# Altium PCB muhendislik_tasarim.PcbDoc
Units mil, origin at the board's own origin, x right, y up, seen from the top; angles counter-clockwise.
Board outline 6000 x 4000 mil, 2 copper layers (Top Layer, Bottom Layer); 8 components, 4 nets, 113 pads, 0 vias.
Unrouted connection lines stored in the file: 12.
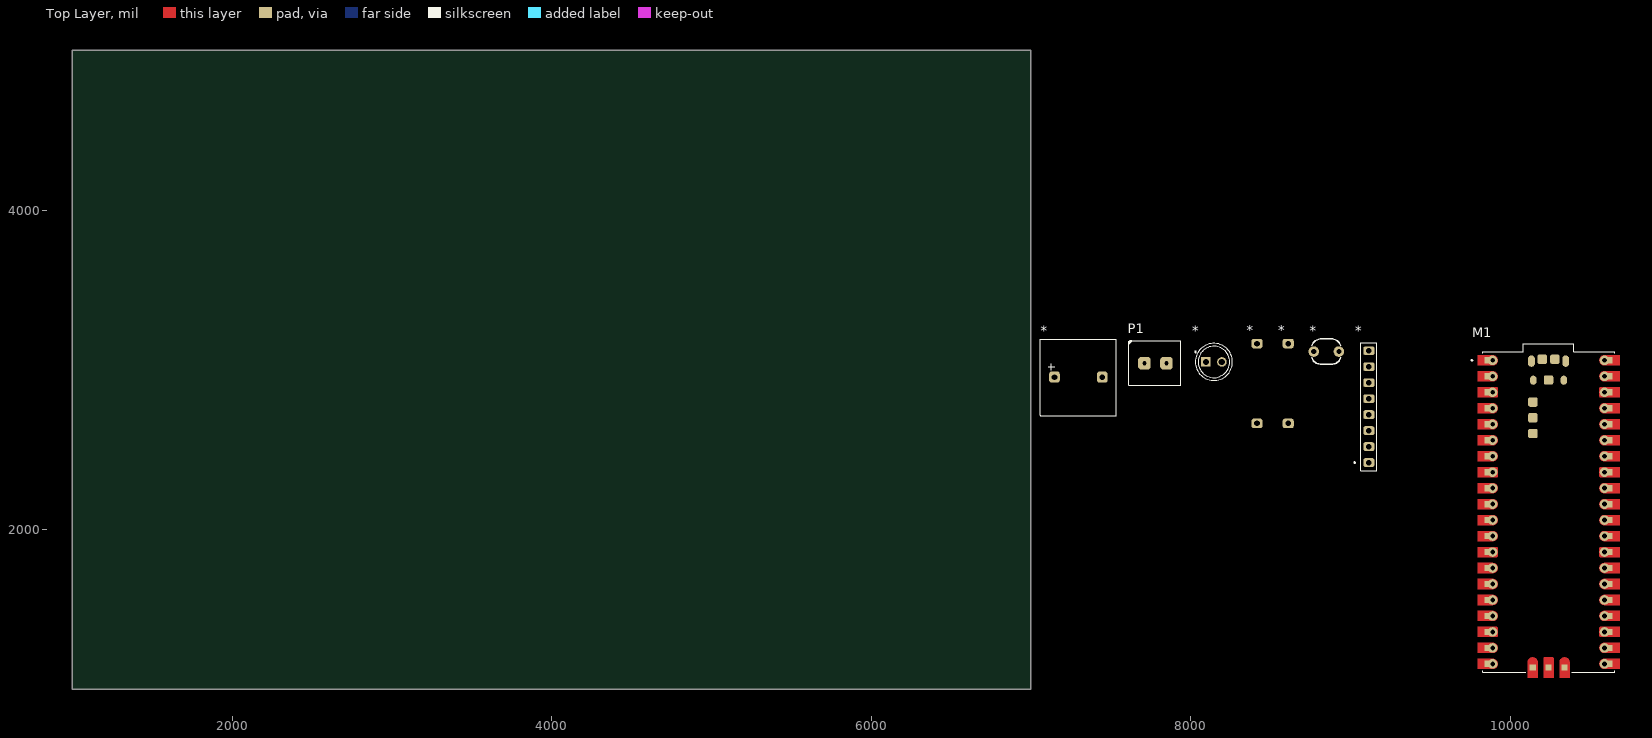
[diagram p0: Top Layer view]
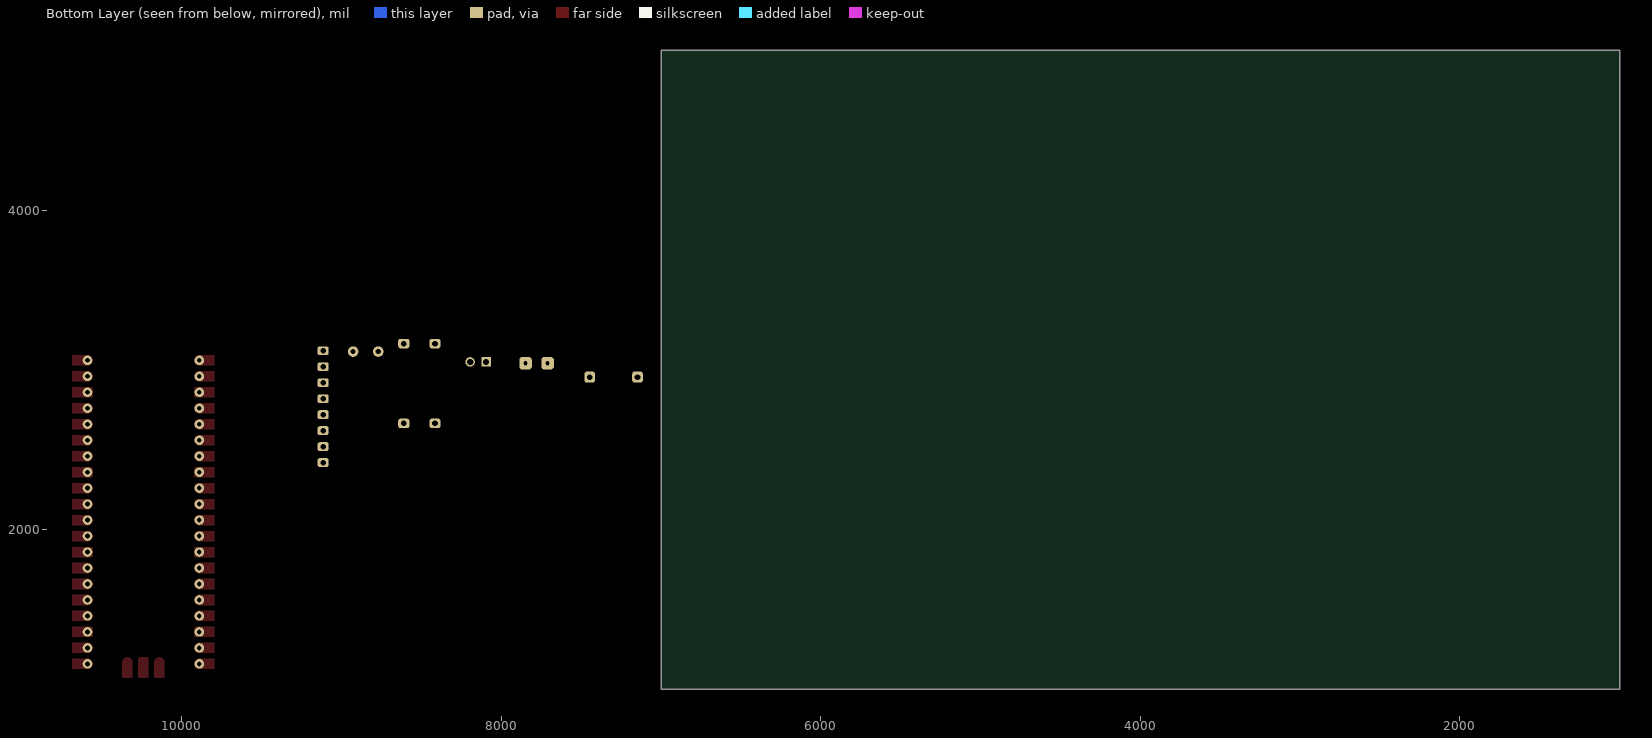
[diagram p1: Bottom Layer view, seen from below]

## Layer stack, top to bottom
Top Solder: solder mask 0.4, Solder Resist, Dk 3.5
Top Layer: signal copper 1.4
Dielectric 1: dielectric 12.6, FR-4, Dk 4.8
Bottom Layer: signal copper 1.4
Bottom Solder: solder mask 0.4, Solder Resist, Dk 3.5

## Board outline
1000,1000 7000,1000 7000,5000 1000,5000

## Design rules (kind name [scope] priority, off if disabled: settings)
Clearance [All] p1: gap=10 ignorepadtopadclearanceinfootprint=FALSE except(0: Arc-Hole Track-Hole SMDPad-Hole THPad-Hole Via-Hole Fill-Hole Poly-Hole Region-Hole Text-Hole)
PolygonConnect [All] p1: connectstyle=Relief reliefconductorwidth=10 reliefentries=4 polygonreliefangle="90 Angle" airgapwidth=10
RoomDefinition muhendislik_tasarim [InComponentClass('muhendislik_tasarim')] p1: confinementstyle=ConfineIn formatcopy=TRUE lockcomponents=FALSE outline 7045,1055 10705,1055 10705,3285 7045,3285
RoutingVias [All] p1: holewidth=28 width=50 viastyle="Through Hole" minholewidth=28 minwidth=50 maxholewidth=28 maxwidth=50
SolderMaskExpansion [All] p1: expansion=4 istentingtop=FALSE
Width [All] p1: maxlimit=10 minlimit=10 preferedwidth=10
30 further rules are at their usual default settings.

## Classes and differential pairs
component class muhendislik_tasarim: M1 P1

## Components (designator, comment, footprint, x,y, rotation, side; value= is the part's Value field where it differs from the comment)
* "resistor" resistor 8485,2650 r90 top
* "ldr" ldr 8755,3035 r0 top
* "resistor" resistor 8680,2650 r90 top
* "led" led 8040,2965 r0 top
* "mpu6050" mpu6050 9055,2360 r90 top
* "buzzer" buzzer 7045,2715 r0 top
M1 "raspberry_pico" raspberry_pico 9810,1060 r0 top
P1 "power" power 7615,3180 r0 top

## Footprints (in the part's own frame and the unit in brackets; to place one, negate y for a bottom-side part, rotate by r counter-clockwise, add the part's x,y. Pads: shape width x height; smd on the part's side, far side on the other; paste and mask are expansions set on the pad)
buzzer [mil]
  rrect50% 66.93x70 hole 35 mask+1.97: 1(102.24,239.88) 2(401.46,239.88)
  silkscreen extent 13,-1 490,477, body extent 16,2 488,474, height 374
ldr [mil]
  round 66 hole 31.5: 1(15,80) 2(172.48,80)
  silkscreen extent 3,1 184,159, body extent -3,-4 193,154, height 83
led [mil]
  round 59.37 hole 39.37: A(155,85)
  rect 59.37x59.37 hole 39.37: C(55,85)
  silkscreen extent -14,-31 221,201, body extent 3,-2 217,230, height 316
mpu6050 [mil]
  rrect50% 55.43x70 hole 35: 1(60,-60) 2(160,-60) 3(260,-60) 4(360,-60) 5(460,-60) 6(560,-60) 7(660,-60) 8(760,-60)
  silkscreen extent 10,-110 810,33, body extent -8,-650 838,0, height 334
power [mm]
  rrect50% 2x2 hole 0.65: 1(2.419,-3.514) 2(5.919,-3.514)
  silkscreen extent -0.09,-7.04 8.22,0.11, body extent 0.57,-10.92 8.07,-3.28, height 2.95
raspberry_pico [mil]
  rect 39.37x39.37 smd paste-39.37 mask+0: 1(48.5,2000) 2(48.5,1900) 3(48.5,1800) 4(48.5,1700) 5(48.5,1600) 6(48.5,1500) 7(48.5,1400) 8(48.5,1300) 9(48.5,1200) 10(48.5,1100) 11(48.5,1000) 12(48.5,900) 13(48.5,800) 14(48.5,700) 15(48.5,600) 16(48.5,500) 17(48.5,400) 18(48.5,300) 19(48.5,200) 20(48.5,100) 21(811.5,100) 22(811.5,200) 23(811.5,300) 24(811.5,400) 25(811.5,500) 26(811.5,600) 27(811.5,700) 28(811.5,800) 29(811.5,900) 30(811.5,1000) 31(811.5,1100) 32(811.5,1200) 33(811.5,1300) 34(811.5,1400) 35(811.5,1500) 36(811.5,1600) 37(811.5,1700) 38(811.5,1800) 39(811.5,1900) 40(811.5,2000) D1(330,77.56) D2(430,77.56) D3(530,77.56)
  round 60 hole 30: 1(80,2000) 2(80,1900) 3(80,1800) 4(80,1700) 5(80,1600) 6(80,1500) 7(80,1400) 8(80,1300) 9(80,1200) 10(80,1100) 11(80,1000) 12(80,900) 13(80,800) 14(80,700) 15(80,600) 16(80,500) 17(80,400) 18(80,300) 19(80,200) 20(80,100) 21(780,100) 22(780,200) 23(780,300) 24(780,400) 25(780,500) 26(780,600) 27(780,700) 28(780,800) 29(780,900) 30(780,1000) 31(780,1100) 32(780,1200) 33(780,1300) 34(780,1400) 35(780,1500) 36(780,1600) 37(780,1700) 38(780,1800) 39(780,1900) 40(780,2000)
  oval 43.31x70.87 smd: A(322.72,1994.88) B(537.28,1994.88)
  oval 41.34x57.09 smd: C(334.53,1875.59) D(525.47,1875.59)
  rrect40% 59.06x59.06 smd: TP1(430,1876.77) TP2(469.37,2006.69) TP3(390.63,2006.69) TP4(331.57,1738.98) TP5(331.57,1640.55) TP6(331.57,1542.13)
  Top Layer region: 81.65,1231.46 83.31,1231.34 84.92,1231.1 86.54,1230.83 88.15,1230.43 89.72,1229.96 91.3,1229.41 92.8,1228.78 94.29,1228.07 95.75,1227.28 97.17,1226.42 98.5,1225.47 99.8,1224.49 101.06,1223.43 102.28,1222.28 103.43,1221.06 104.49,1219.8 105.47,1218.5 106.42,1217.17 107.28,1215.75 108.07,1214.29 108.78,1212.8 109.41,1211.3 109.96,1209.72 110.43,1208.15 110.83,1206.54 111.1,1204.92 111.34,1203.31 111.46,1201.65 111.5,1200 111.46,1198.35 111.34,1196.69 111.1,1195.08 110.83,1193.46 110.43,1191.85 109.96,1190.28 109.41,1188.7 108.78,1187.2 108.07,1185.71 107.28,1184.25 106.42,1182.83 105.47,1181.5 104.49,1180.2 103.43,1178.94 102.28,1177.72 101.06,1176.57 99.8,1175.51 98.5,1174.53 97.17,1173.58 95.75,1172.72 94.29,1171.93 92.8,1171.22 91.3,1170.59 89.72,1170.04 88.15,1169.57 86.54,1169.17 84.92,1168.9 83.31,1168.66 81.65,1168.54 80,1168.5 -14.49,1168.5 -14.49,1231.5 80,1231.5
  Top Layer region: 81.65,1131.46 83.31,1131.34 84.92,1131.1 86.54,1130.83 88.15,1130.43 89.72,1129.96 91.3,1129.41 92.8,1128.78 94.29,1128.07 95.75,1127.28 97.17,1126.42 98.5,1125.47 99.8,1124.49 101.06,1123.43 102.28,1122.28 103.43,1121.06 104.49,1119.8 105.47,1118.5 106.42,1117.17 107.28,1115.75 108.07,1114.29 108.78,1112.8 109.41,1111.3 109.96,1109.72 110.43,1108.15 110.83,1106.54 111.1,1104.92 111.34,1103.31 111.46,1101.65 111.5,1100 111.46,1098.35 111.34,1096.69 111.1,1095.08 110.83,1093.46 110.43,1091.85 109.96,1090.28 109.41,1088.7 108.78,1087.2 108.07,1085.71 107.28,1084.25 106.42,1082.83 105.47,1081.5 104.49,1080.2 103.43,1078.94 102.28,1077.72 101.06,1076.57 99.8,1075.51 98.5,1074.53 97.17,1073.58 95.75,1072.72 94.29,1071.93 92.8,1071.22 91.3,1070.59 89.72,1070.04 88.15,1069.57 86.54,1069.17 84.92,1068.9 83.31,1068.66 81.65,1068.54 80,1068.5 -14.49,1068.5 -14.49,1131.5 80,1131.5
  Top Layer region: 81.65,1031.46 83.31,1031.34 84.92,1031.1 86.54,1030.83 88.15,1030.43 89.72,1029.96 91.3,1029.41 92.8,1028.78 94.29,1028.07 95.75,1027.28 97.17,1026.42 98.5,1025.47 99.8,1024.49 101.06,1023.43 102.28,1022.28 103.43,1021.06 104.49,1019.8 105.47,1018.5 106.42,1017.17 107.28,1015.75 108.07,1014.29 108.78,1012.8 109.41,1011.3 109.96,1009.72 110.43,1008.15 110.83,1006.54 111.1,1004.92 111.34,1003.31 111.46,1001.65 111.5,1000 111.46,998.35 111.34,996.69 111.1,995.08 110.83,993.46 110.43,991.85 109.96,990.28 109.41,988.7 108.78,987.2 108.07,985.71 107.28,984.25 106.42,982.83 105.47,981.5 104.49,980.2 103.43,978.94 102.28,977.72 101.06,976.57 99.8,975.51 98.5,974.53 97.17,973.58 95.75,972.72 94.29,971.93 92.8,971.22 91.3,970.59 89.72,970.04 88.15,969.57 86.54,969.17 84.92,968.9 83.31,968.66 81.65,968.54 80,968.5 -14.49,968.5 -14.49,1031.5 80,1031.5
  Top Layer region: 81.65,931.46 83.31,931.34 84.92,931.1 86.54,930.83 88.15,930.43 89.72,929.96 91.3,929.41 92.8,928.78 94.29,928.07 95.75,927.28 97.17,926.42 98.5,925.47 99.8,924.49 101.06,923.43 102.28,922.28 103.43,921.06 104.49,919.8 105.47,918.5 106.42,917.17 107.28,915.75 108.07,914.29 108.78,912.8 109.41,911.3 109.96,909.72 110.43,908.15 110.83,906.54 111.1,904.92 111.34,903.31 111.46,901.65 111.5,900 111.46,898.35 111.34,896.69 111.1,895.08 110.83,893.46 110.43,891.85 109.96,890.28 109.41,888.7 108.78,887.2 108.07,885.71 107.28,884.25 106.42,882.83 105.47,881.5 104.49,880.2 103.43,878.94 102.28,877.72 101.06,876.57 99.8,875.51 98.5,874.53 97.17,873.58 95.75,872.72 94.29,871.93 92.8,871.22 91.3,870.59 89.72,870.04 88.15,869.57 86.54,869.17 84.92,868.9 83.31,868.66 81.65,868.54 80,868.5 -14.49,868.5 -14.49,931.5 80,931.5
  Top Layer region: 81.65,731.46 83.31,731.34 84.92,731.1 86.54,730.83 88.15,730.43 89.72,729.96 91.3,729.41 92.8,728.78 94.29,728.07 95.75,727.28 97.17,726.42 98.5,725.47 99.8,724.49 101.06,723.43 102.28,722.28 103.43,721.06 104.49,719.8 105.47,718.5 106.42,717.17 107.28,715.75 108.07,714.29 108.78,712.8 109.41,711.3 109.96,709.72 110.43,708.15 110.83,706.54 111.1,704.92 111.34,703.31 111.46,701.65 111.5,700 111.46,698.35 111.34,696.69 111.1,695.08 110.83,693.46 110.43,691.85 109.96,690.28 109.41,688.7 108.78,687.2 108.07,685.71 107.28,684.25 106.42,682.83 105.47,681.5 104.49,680.2 103.43,678.94 102.28,677.72 101.06,676.57 99.8,675.51 98.5,674.53 97.17,673.58 95.75,672.72 94.29,671.93 92.8,671.22 91.3,670.59 89.72,670.04 88.15,669.57 86.54,669.17 84.92,668.9 83.31,668.66 81.65,668.54 80,668.5 -14.49,668.5 -14.49,731.5 80,731.5
  Top Layer region: 81.65,631.46 83.31,631.34 84.92,631.1 86.54,630.83 88.15,630.43 89.72,629.96 91.3,629.41 92.8,628.78 94.29,628.07 95.75,627.28 97.17,626.42 98.5,625.47 99.8,624.49 101.06,623.43 102.28,622.28 103.43,621.06 104.49,619.8 105.47,618.5 106.42,617.17 107.28,615.75 108.07,614.29 108.78,612.8 109.41,611.3 109.96,609.72 110.43,608.15 110.83,606.54 111.1,604.92 111.34,603.31 111.46,601.65 111.5,600 111.46,598.35 111.34,596.69 111.1,595.08 110.83,593.46 110.43,591.85 109.96,590.28 109.41,588.7 108.78,587.2 108.07,585.71 107.28,584.25 106.42,582.83 105.47,581.5 104.49,580.2 103.43,578.94 102.28,577.72 101.06,576.57 99.8,575.51 98.5,574.53 97.17,573.58 95.75,572.72 94.29,571.93 92.8,571.22 91.3,570.59 89.72,570.04 88.15,569.57 86.54,569.17 84.92,568.9 83.31,568.66 81.65,568.54 80,568.5 -14.49,568.5 -14.49,631.5 80,631.5
  Top Layer region: 81.65,531.46 83.31,531.34 84.92,531.1 86.54,530.83 88.15,530.43 89.72,529.96 91.3,529.41 92.8,528.78 94.29,528.07 95.75,527.28 97.17,526.42 98.5,525.47 99.8,524.49 101.06,523.43 102.28,522.28 103.43,521.06 104.49,519.8 105.47,518.5 106.42,517.17 107.28,515.75 108.07,514.29 108.78,512.8 109.41,511.3 109.96,509.72 110.43,508.15 110.83,506.54 111.1,504.92 111.34,503.31 111.46,501.65 111.5,500 111.46,498.35 111.34,496.69 111.1,495.08 110.83,493.46 110.43,491.85 109.96,490.28 109.41,488.7 108.78,487.2 108.07,485.71 107.28,484.25 106.42,482.83 105.47,481.5 104.49,480.2 103.43,478.94 102.28,477.72 101.06,476.57 99.8,475.51 98.5,474.53 97.17,473.58 95.75,472.72 94.29,471.93 92.8,471.22 91.3,470.59 89.72,470.04 88.15,469.57 86.54,469.17 84.92,468.9 83.31,468.66 81.65,468.54 80,468.5 -14.49,468.5 -14.49,531.5 80,531.5
  Top Layer region: 81.65,431.46 83.31,431.34 84.92,431.1 86.54,430.83 88.15,430.43 89.72,429.96 91.3,429.41 92.8,428.78 94.29,428.07 95.75,427.28 97.17,426.42 98.5,425.47 99.8,424.49 101.06,423.43 102.28,422.28 103.43,421.06 104.49,419.8 105.47,418.5 106.42,417.17 107.28,415.75 108.07,414.29 108.78,412.8 109.41,411.3 109.96,409.72 110.43,408.15 110.83,406.54 111.1,404.92 111.34,403.31 111.46,401.65 111.5,400 111.46,398.35 111.34,396.69 111.1,395.08 110.83,393.46 110.43,391.85 109.96,390.28 109.41,388.7 108.78,387.2 108.07,385.71 107.28,384.25 106.42,382.83 105.47,381.5 104.49,380.2 103.43,378.94 102.28,377.72 101.06,376.57 99.8,375.51 98.5,374.53 97.17,373.58 95.75,372.72 94.29,371.93 92.8,371.22 91.3,370.59 89.72,370.04 88.15,369.57 86.54,369.17 84.92,368.9 83.31,368.66 81.65,368.54 80,368.5 -14.49,368.5 -14.49,431.5 80,431.5
  Top Layer region: 81.65,231.46 83.31,231.34 84.92,231.1 86.54,230.83 88.15,230.43 89.72,229.96 91.3,229.41 92.8,228.78 94.29,228.07 95.75,227.28 97.17,226.42 98.5,225.47 99.8,224.49 101.06,223.43 102.28,222.28 103.43,221.06 104.49,219.8 105.47,218.5 106.42,217.17 107.28,215.75 108.07,214.29 108.78,212.8 109.41,211.3 109.96,209.72 110.43,208.15 110.83,206.54 111.1,204.92 111.34,203.31 111.46,201.65 111.5,200 111.46,198.35 111.34,196.69 111.1,195.08 110.83,193.46 110.43,191.85 109.96,190.28 109.41,188.7 108.78,187.2 108.07,185.71 107.28,184.25 106.42,182.83 105.47,181.5 104.49,180.2 103.43,178.94 102.28,177.72 101.06,176.57 99.8,175.51 98.5,174.53 97.17,173.58 95.75,172.72 94.29,171.93 92.8,171.22 91.3,170.59 89.72,170.04 88.15,169.57 86.54,169.17 84.92,168.9 83.31,168.66 81.65,168.54 80,168.5 -14.49,168.5 -14.49,231.5 80,231.5
  Top Layer region: 81.65,131.46 83.31,131.34 84.92,131.1 86.54,130.83 88.15,130.43 89.72,129.96 91.3,129.41 92.8,128.78 94.29,128.07 95.75,127.28 97.17,126.42 98.5,125.47 99.8,124.49 101.06,123.43 102.28,122.28 103.43,121.06 104.49,119.8 105.47,118.5 106.42,117.17 107.28,115.75 108.07,114.29 108.78,112.8 109.41,111.3 109.96,109.72 110.43,108.15 110.83,106.54 111.1,104.92 111.34,103.31 111.46,101.65 111.5,100 111.46,98.35 111.34,96.69 111.1,95.08 110.83,93.46 110.43,91.85 109.96,90.28 109.41,88.7 108.78,87.2 108.07,85.71 107.28,84.25 106.42,82.83 105.47,81.5 104.49,80.2 103.43,78.94 102.28,77.72 101.06,76.57 99.8,75.51 98.5,74.53 97.17,73.58 95.75,72.72 94.29,71.93 92.8,71.22 91.3,70.59 89.72,70.04 88.15,69.57 86.54,69.17 84.92,68.9 83.31,68.66 81.65,68.54 80,68.5 -14.49,68.5 -14.49,131.5 80,131.5
  Top Layer region: 104.45,1831.46 104.84,1831.42 105.28,1831.34 105.67,1831.22 106.06,1831.1 106.46,1830.98 106.81,1830.83 107.2,1830.63 107.56,1830.43 107.91,1830.24 108.27,1830 108.58,1829.72 108.9,1829.49 109.17,1829.17 109.49,1828.9 109.72,1828.58 110,1828.27 110.24,1827.91 110.43,1827.56 110.63,1827.2 110.83,1826.81 110.98,1826.46 111.1,1826.06 111.22,1825.67 111.34,1825.28 111.42,1824.84 111.46,1824.45 111.5,1824.02 111.5,1823.62 111.5,1776.38 111.5,1775.98 111.46,1775.55 111.42,1775.16 111.34,1774.72 111.22,1774.33 111.1,1773.94 110.98,1773.54 110.83,1773.19 110.63,1772.8 110.43,1772.44 110.24,1772.09 110,1771.73 109.72,1771.42 109.49,1771.1 109.17,1770.83 108.9,1770.51 108.58,1770.28 108.27,1770 107.91,1769.76 107.56,1769.57 107.2,1769.37 106.81,1769.17 106.46,1769.02 106.06,1768.9 105.67,1768.78 105.28,1768.66 104.84,1768.58 104.45,1768.54 104.02,1768.5 -14.49,1768.5 -14.49,1831.5 104.02,1831.5
  Top Layer region: 104.45,1331.46 104.84,1331.42 105.28,1331.34 105.67,1331.22 106.06,1331.1 106.46,1330.98 106.81,1330.83 107.2,1330.63 107.56,1330.43 107.91,1330.24 108.27,1330 108.58,1329.72 108.9,1329.49 109.17,1329.17 109.49,1328.9 109.72,1328.58 110,1328.27 110.24,1327.91 110.43,1327.56 110.63,1327.2 110.83,1326.81 110.98,1326.46 111.1,1326.06 111.22,1325.67 111.34,1325.28 111.42,1324.84 111.46,1324.45 111.5,1324.02 111.5,1323.62 111.5,1276.38 111.5,1275.98 111.46,1275.55 111.42,1275.16 111.34,1274.72 111.22,1274.33 111.1,1273.94 110.98,1273.54 110.83,1273.19 110.63,1272.8 110.43,1272.44 110.24,1272.09 110,1271.73 109.72,1271.42 109.49,1271.1 109.17,1270.83 108.9,1270.51 108.58,1270.28 108.27,1270 107.91,1269.76 107.56,1269.57 107.2,1269.37 106.81,1269.17 106.46,1269.02 106.06,1268.9 105.67,1268.78 105.28,1268.66 104.84,1268.58 104.45,1268.54 104.02,1268.5 -14.49,1268.5 -14.49,1331.5 104.02,1331.5
  Top Layer region: 104.45,831.46 104.84,831.42 105.28,831.34 105.67,831.22 106.06,831.1 106.46,830.98 106.81,830.83 107.2,830.63 107.56,830.43 107.91,830.24 108.27,830 108.58,829.72 108.9,829.49 109.17,829.17 109.49,828.9 109.72,828.58 110,828.27 110.24,827.91 110.43,827.56 110.63,827.2 110.83,826.81 110.98,826.46 111.1,826.06 111.22,825.67 111.34,825.28 111.42,824.84 111.46,824.45 111.5,824.02 111.5,823.62 111.5,776.38 111.5,775.98 111.46,775.55 111.42,775.16 111.34,774.72 111.22,774.33 111.1,773.94 110.98,773.54 110.83,773.19 110.63,772.8 110.43,772.44 110.24,772.09 110,771.73 109.72,771.42 109.49,771.1 109.17,770.83 108.9,770.51 108.58,770.28 108.27,770 107.91,769.76 107.56,769.57 107.2,769.37 106.81,769.17 106.46,769.02 106.06,768.9 105.67,768.78 105.28,768.66 104.84,768.58 104.45,768.54 104.02,768.5 -14.49,768.5 -14.49,831.5 104.02,831.5
  Top Layer region: 104.45,331.46 104.84,331.42 105.28,331.34 105.67,331.22 106.06,331.1 106.46,330.98 106.81,330.83 107.2,330.63 107.56,330.43 107.91,330.24 108.27,330 108.58,329.72 108.9,329.49 109.17,329.17 109.49,328.9 109.72,328.58 110,328.27 110.24,327.91 110.43,327.56 110.63,327.2 110.83,326.81 110.98,326.46 111.1,326.06 111.22,325.67 111.34,325.28 111.42,324.84 111.46,324.45 111.5,324.02 111.5,323.62 111.5,276.38 111.5,275.98 111.46,275.55 111.42,275.16 111.34,274.72 111.22,274.33 111.1,273.94 110.98,273.54 110.83,273.19 110.63,272.8 110.43,272.44 110.24,272.09 110,271.73 109.72,271.42 109.49,271.1 109.17,270.83 108.9,270.51 108.58,270.28 108.27,270 107.91,269.76 107.56,269.57 107.2,269.37 106.81,269.17 106.46,269.02 106.06,268.9 105.67,268.78 105.28,268.66 104.84,268.58 104.45,268.54 104.02,268.5 -14.49,268.5 -14.49,331.5 104.02,331.5
  Top Layer region: 81.65,1931.46 83.31,1931.34 84.92,1931.1 86.54,1930.83 88.15,1930.43 89.72,1929.96 91.3,1929.41 92.8,1928.78 94.29,1928.07 95.75,1927.28 97.17,1926.42 98.5,1925.47 99.8,1924.49 101.06,1923.43 102.28,1922.28 103.43,1921.06 104.49,1919.8 105.47,1918.5 106.42,1917.17 107.28,1915.75 108.07,1914.29 108.78,1912.8 109.41,1911.3 109.96,1909.72 110.43,1908.15 110.83,1906.54 111.1,1904.92 111.34,1903.31 111.46,1901.65 111.5,1900 111.46,1898.35 111.34,1896.69 111.1,1895.08 110.83,1893.46 110.43,1891.85 109.96,1890.28 109.41,1888.7 108.78,1887.2 108.07,1885.71 107.28,1884.25 106.42,1882.83 105.47,1881.5 104.49,1880.2 103.43,1878.94 102.28,1877.72 101.06,1876.57 99.8,1875.51 98.5,1874.53 97.17,1873.58 95.75,1872.72 94.29,1871.93 92.8,1871.22 91.3,1870.59 89.72,1870.04 88.15,1869.57 86.54,1869.17 84.92,1868.9 83.31,1868.66 81.65,1868.54 80,1868.5 -14.49,1868.5 -14.49,1931.5 80,1931.5
  Top Layer region: 81.65,1731.46 83.31,1731.34 84.92,1731.1 86.54,1730.83 88.15,1730.43 89.72,1729.96 91.3,1729.41 92.8,1728.78 94.29,1728.07 95.75,1727.28 97.17,1726.42 98.5,1725.47 99.8,1724.49 101.06,1723.43 102.28,1722.28 103.43,1721.06 104.49,1719.8 105.47,1718.5 106.42,1717.17 107.28,1715.75 108.07,1714.29 108.78,1712.8 109.41,1711.3 109.96,1709.72 110.43,1708.15 110.83,1706.54 111.1,1704.92 111.34,1703.31 111.46,1701.65 111.5,1700 111.46,1698.35 111.34,1696.69 111.1,1695.08 110.83,1693.46 110.43,1691.85 109.96,1690.28 109.41,1688.7 108.78,1687.2 108.07,1685.71 107.28,1684.25 106.42,1682.83 105.47,1681.5 104.49,1680.2 103.43,1678.94 102.28,1677.72 101.06,1676.57 99.8,1675.51 98.5,1674.53 97.17,1673.58 95.75,1672.72 94.29,1671.93 92.8,1671.22 91.3,1670.59 89.72,1670.04 88.15,1669.57 86.54,1669.17 84.92,1668.9 83.31,1668.66 81.65,1668.54 80,1668.5 -14.49,1668.5 -14.49,1731.5 80,1731.5
  Top Layer region: 81.65,1631.46 83.31,1631.34 84.92,1631.1 86.54,1630.83 88.15,1630.43 89.72,1629.96 91.3,1629.41 92.8,1628.78 94.29,1628.07 95.75,1627.28 97.17,1626.42 98.5,1625.47 99.8,1624.49 101.06,1623.43 102.28,1622.28 103.43,1621.06 104.49,1619.8 105.47,1618.5 106.42,1617.17 107.28,1615.75 108.07,1614.29 108.78,1612.8 109.41,1611.3 109.96,1609.72 110.43,1608.15 110.83,1606.54 111.1,1604.92 111.34,1603.31 111.46,1601.65 111.5,1600 111.46,1598.35 111.34,1596.69 111.1,1595.08 110.83,1593.46 110.43,1591.85 109.96,1590.28 109.41,1588.7 108.78,1587.2 108.07,1585.71 107.28,1584.25 106.42,1582.83 105.47,1581.5 104.49,1580.2 103.43,1578.94 102.28,1577.72 101.06,1576.57 99.8,1575.51 98.5,1574.53 97.17,1573.58 95.75,1572.72 94.29,1571.93 92.8,1571.22 91.3,1570.59 89.72,1570.04 88.15,1569.57 86.54,1569.17 84.92,1568.9 83.31,1568.66 81.65,1568.54 80,1568.5 -14.49,1568.5 -14.49,1631.5 80,1631.5
  Top Layer region: 81.65,1531.46 83.31,1531.34 84.92,1531.1 86.54,1530.83 88.15,1530.43 89.72,1529.96 91.3,1529.41 92.8,1528.78 94.29,1528.07 95.75,1527.28 97.17,1526.42 98.5,1525.47 99.8,1524.49 101.06,1523.43 102.28,1522.28 103.43,1521.06 104.49,1519.8 105.47,1518.5 106.42,1517.17 107.28,1515.75 108.07,1514.29 108.78,1512.8 109.41,1511.3 109.96,1509.72 110.43,1508.15 110.83,1506.54 111.1,1504.92 111.34,1503.31 111.46,1501.65 111.5,1500 111.46,1498.35 111.34,1496.69 111.1,1495.08 110.83,1493.46 110.43,1491.85 109.96,1490.28 109.41,1488.7 108.78,1487.2 108.07,1485.71 107.28,1484.25 106.42,1482.83 105.47,1481.5 104.49,1480.2 103.43,1478.94 102.28,1477.72 101.06,1476.57 99.8,1475.51 98.5,1474.53 97.17,1473.58 95.75,1472.72 94.29,1471.93 92.8,1471.22 91.3,1470.59 89.72,1470.04 88.15,1469.57 86.54,1469.17 84.92,1468.9 83.31,1468.66 81.65,1468.54 80,1468.5 -14.49,1468.5 -14.49,1531.5 80,1531.5
  Top Layer region: 81.65,1431.46 83.31,1431.34 84.92,1431.1 86.54,1430.83 88.15,1430.43 89.72,1429.96 91.3,1429.41 92.8,1428.78 94.29,1428.07 95.75,1427.28 97.17,1426.42 98.5,1425.47 99.8,1424.49 101.06,1423.43 102.28,1422.28 103.43,1421.06 104.49,1419.8 105.47,1418.5 106.42,1417.17 107.28,1415.75 108.07,1414.29 108.78,1412.8 109.41,1411.3 109.96,1409.72 110.43,1408.15 110.83,1406.54 111.1,1404.92 111.34,1403.31 111.46,1401.65 111.5,1400 111.46,1398.35 111.34,1396.69 111.1,1395.08 110.83,1393.46 110.43,1391.85 109.96,1390.28 109.41,1388.7 108.78,1387.2 108.07,1385.71 107.28,1384.25 106.42,1382.83 105.47,1381.5 104.49,1380.2 103.43,1378.94 102.28,1377.72 101.06,1376.57 99.8,1375.51 98.5,1374.53 97.17,1373.58 95.75,1372.72 94.29,1371.93 92.8,1371.22 91.3,1370.59 89.72,1370.04 88.15,1369.57 86.54,1369.17 84.92,1368.9 83.31,1368.66 81.65,1368.54 80,1368.5 -14.49,1368.5 -14.49,1431.5 80,1431.5
  Top Layer region: 874.49,1768.5 755.98,1768.5 755.55,1768.54 755.16,1768.58 754.72,1768.66 754.33,1768.78 753.94,1768.9 753.54,1769.02 753.19,1769.17 752.8,1769.37 752.44,1769.57 752.09,1769.76 751.73,1770 751.42,1770.28 751.1,1770.51 750.83,1770.83 750.51,1771.1 750.28,1771.42 750,1771.73 749.76,1772.09 749.57,1772.44 749.37,1772.8 749.17,1773.19 749.02,1773.54 748.9,1773.94 748.78,1774.33 748.66,1774.72 748.58,1775.16 748.54,1775.55 748.5,1775.98 748.5,1776.38 748.5,1823.62 748.5,1824.02 748.54,1824.45 748.58,1824.84 748.66,1825.28 748.78,1825.67 748.9,1826.06 749.02,1826.46 749.17,1826.81 749.37,1827.2 749.57,1827.56 749.76,1827.91 750,1828.27 750.28,1828.58 750.51,1828.9 750.83,1829.17 751.1,1829.49 751.42,1829.72 751.73,1830 752.09,1830.24 752.44,1830.43 752.8,1830.63 753.19,1830.83 753.54,1830.98 753.94,1831.1 754.33,1831.22 754.72,1831.34 755.16,1831.42 755.55,1831.46 755.98,1831.5 874.49,1831.5
  Top Layer region: 874.49,1868.5 780,1868.5 778.35,1868.54 776.69,1868.66 775.08,1868.9 773.46,1869.17 771.85,1869.57 770.28,1870.04 768.7,1870.59 767.2,1871.22 765.71,1871.93 764.25,1872.72 762.83,1873.58 761.5,1874.53 760.2,1875.51 758.94,1876.57 757.72,1877.72 756.57,1878.94 755.51,1880.2 754.53,1881.5 753.58,1882.83 752.72,1884.25 751.93,1885.71 751.22,1887.2 750.59,1888.7 750.04,1890.28 749.57,1891.85 749.17,1893.46 748.9,1895.08 748.66,1896.69 748.54,1898.35 748.5,1900 748.54,1901.65 748.66,1903.31 748.9,1904.92 749.17,1906.54 749.57,1908.15 750.04,1909.72 750.59,1911.3 751.22,1912.8 751.93,1914.29 752.72,1915.75 753.58,1917.17 754.53,1918.5 755.51,1919.8 756.57,1921.06 757.72,1922.28 758.94,1923.43 760.2,1924.49 761.5,1925.47 762.83,1926.42 764.25,1927.28 765.71,1928.07 767.2,1928.78 768.7,1929.41 770.28,1929.96 771.85,1930.43 773.46,1930.83 775.08,1931.1 776.69,1931.34 778.35,1931.46 780,1931.5 874.49,1931.5
  Top Layer region: 874.49,1468.5 780,1468.5 778.35,1468.54 776.69,1468.66 775.08,1468.9 773.46,1469.17 771.85,1469.57 770.28,1470.04 768.7,1470.59 767.2,1471.22 765.71,1471.93 764.25,1472.72 762.83,1473.58 761.5,1474.53 760.2,1475.51 758.94,1476.57 757.72,1477.72 756.57,1478.94 755.51,1480.2 754.53,1481.5 753.58,1482.83 752.72,1484.25 751.93,1485.71 751.22,1487.2 750.59,1488.7 750.04,1490.28 749.57,1491.85 749.17,1493.46 748.9,1495.08 748.66,1496.69 748.54,1498.35 748.5,1500 748.54,1501.65 748.66,1503.31 748.9,1504.92 749.17,1506.54 749.57,1508.15 750.04,1509.72 750.59,1511.3 751.22,1512.8 751.93,1514.29 752.72,1515.75 753.58,1517.17 754.53,1518.5 755.51,1519.8 756.57,1521.06 757.72,1522.28 758.94,1523.43 760.2,1524.49 761.5,1525.47 762.83,1526.42 764.25,1527.28 765.71,1528.07 767.2,1528.78 768.7,1529.41 770.28,1529.96 771.85,1530.43 773.46,1530.83 775.08,1531.1 776.69,1531.34 778.35,1531.46 780,1531.5 874.49,1531.5
  Top Layer region: 874.49,968.5 780,968.5 778.35,968.54 776.69,968.66 775.08,968.9 773.46,969.17 771.85,969.57 770.28,970.04 768.7,970.59 767.2,971.22 765.71,971.93 764.25,972.72 762.83,973.58 761.5,974.53 760.2,975.51 758.94,976.57 757.72,977.72 756.57,978.94 755.51,980.2 754.53,981.5 753.58,982.83 752.72,984.25 751.93,985.71 751.22,987.2 750.59,988.7 750.04,990.28 749.57,991.85 749.17,993.46 748.9,995.08 748.66,996.69 748.54,998.35 748.5,1000 748.54,1001.65 748.66,1003.31 748.9,1004.92 749.17,1006.54 749.57,1008.15 750.04,1009.72 750.59,1011.3 751.22,1012.8 751.93,1014.29 752.72,1015.75 753.58,1017.17 754.53,1018.5 755.51,1019.8 756.57,1021.06 757.72,1022.28 758.94,1023.43 760.2,1024.49 761.5,1025.47 762.83,1026.42 764.25,1027.28 765.71,1028.07 767.2,1028.78 768.7,1029.41 770.28,1029.96 771.85,1030.43 773.46,1030.83 775.08,1031.1 776.69,1031.34 778.35,1031.46 780,1031.5 874.49,1031.5
  Top Layer region: 874.49,868.5 780,868.5 778.35,868.54 776.69,868.66 775.08,868.9 773.46,869.17 771.85,869.57 770.28,870.04 768.7,870.59 767.2,871.22 765.71,871.93 764.25,872.72 762.83,873.58 761.5,874.53 760.2,875.51 758.94,876.57 757.72,877.72 756.57,878.94 755.51,880.2 754.53,881.5 753.58,882.83 752.72,884.25 751.93,885.71 751.22,887.2 750.59,888.7 750.04,890.28 749.57,891.85 749.17,893.46 748.9,895.08 748.66,896.69 748.54,898.35 748.5,900 748.54,901.65 748.66,903.31 748.9,904.92 749.17,906.54 749.57,908.15 750.04,909.72 750.59,911.3 751.22,912.8 751.93,914.29 752.72,915.75 753.58,917.17 754.53,918.5 755.51,919.8 756.57,921.06 757.72,922.28 758.94,923.43 760.2,924.49 761.5,925.47 762.83,926.42 764.25,927.28 765.71,928.07 767.2,928.78 768.7,929.41 770.28,929.96 771.85,930.43 773.46,930.83 775.08,931.1 776.69,931.34 778.35,931.46 780,931.5 874.49,931.5
  Top Layer region: 874.49,768.5 755.98,768.5 755.55,768.54 755.16,768.58 754.72,768.66 754.33,768.78 753.94,768.9 753.54,769.02 753.19,769.17 752.8,769.37 752.44,769.57 752.09,769.76 751.73,770 751.42,770.28 751.1,770.51 750.83,770.83 750.51,771.1 750.28,771.42 750,771.73 749.76,772.09 749.57,772.44 749.37,772.8 749.17,773.19 749.02,773.54 748.9,773.94 748.78,774.33 748.66,774.72 748.58,775.16 748.54,775.55 748.5,775.98 748.5,776.38 748.5,823.62 748.5,824.02 748.54,824.45 748.58,824.84 748.66,825.28 748.78,825.67 748.9,826.06 749.02,826.46 749.17,826.81 749.37,827.2 749.57,827.56 749.76,827.91 750,828.27 750.28,828.58 750.51,828.9 750.83,829.17 751.1,829.49 751.42,829.72 751.73,830 752.09,830.24 752.44,830.43 752.8,830.63 753.19,830.83 753.54,830.98 753.94,831.1 754.33,831.22 754.72,831.34 755.16,831.42 755.55,831.46 755.98,831.5 874.49,831.5
  Top Layer region: 874.49,1968.5 780,1968.5 778.35,1968.54 776.69,1968.66 775.08,1968.9 773.46,1969.17 771.85,1969.57 770.28,1970.04 768.7,1970.59 767.2,1971.22 765.71,1971.93 764.25,1972.72 762.83,1973.58 761.5,1974.53 760.2,1975.51 758.94,1976.57 757.72,1977.72 756.57,1978.94 755.51,1980.2 754.53,1981.5 753.58,1982.83 752.72,1984.25 751.93,1985.71 751.22,1987.2 750.59,1988.7 750.04,1990.28 749.57,1991.85 749.17,1993.46 748.9,1995.08 748.66,1996.69 748.54,1998.35 748.5,2000 748.54,2001.65 748.66,2003.31 748.9,2004.92 749.17,2006.54 749.57,2008.15 750.04,2009.72 750.59,2011.3 751.22,2012.8 751.93,2014.29 752.72,2015.75 753.58,2017.17 754.53,2018.5 755.51,2019.8 756.57,2021.06 757.72,2022.28 758.94,2023.43 760.2,2024.49 761.5,2025.47 762.83,2026.42 764.25,2027.28 765.71,2028.07 767.2,2028.78 768.7,2029.41 770.28,2029.96 771.85,2030.43 773.46,2030.83 775.08,2031.1 776.69,2031.34 778.35,2031.46 780,2031.5 874.49,2031.5
  Top Layer region: 874.49,1668.5 780,1668.5 778.35,1668.54 776.69,1668.66 775.08,1668.9 773.46,1669.17 771.85,1669.57 770.28,1670.04 768.7,1670.59 767.2,1671.22 765.71,1671.93 764.25,1672.72 762.83,1673.58 761.5,1674.53 760.2,1675.51 758.94,1676.57 757.72,1677.72 756.57,1678.94 755.51,1680.2 754.53,1681.5 753.58,1682.83 752.72,1684.25 751.93,1685.71 751.22,1687.2 750.59,1688.7 750.04,1690.28 749.57,1691.85 749.17,1693.46 748.9,1695.08 748.66,1696.69 748.54,1698.35 748.5,1700 748.54,1701.65 748.66,1703.31 748.9,1704.92 749.17,1706.54 749.57,1708.15 750.04,1709.72 750.59,1711.3 751.22,1712.8 751.93,1714.29 752.72,1715.75 753.58,1717.17 754.53,1718.5 755.51,1719.8 756.57,1721.06 757.72,1722.28 758.94,1723.43 760.2,1724.49 761.5,1725.47 762.83,1726.42 764.25,1727.28 765.71,1728.07 767.2,1728.78 768.7,1729.41 770.28,1729.96 771.85,1730.43 773.46,1730.83 775.08,1731.1 776.69,1731.34 778.35,1731.46 780,1731.5 874.49,1731.5
  Top Layer region: 874.49,1568.5 780,1568.5 778.35,1568.54 776.69,1568.66 775.08,1568.9 773.46,1569.17 771.85,1569.57 770.28,1570.04 768.7,1570.59 767.2,1571.22 765.71,1571.93 764.25,1572.72 762.83,1573.58 761.5,1574.53 760.2,1575.51 758.94,1576.57 757.72,1577.72 756.57,1578.94 755.51,1580.2 754.53,1581.5 753.58,1582.83 752.72,1584.25 751.93,1585.71 751.22,1587.2 750.59,1588.7 750.04,1590.28 749.57,1591.85 749.17,1593.46 748.9,1595.08 748.66,1596.69 748.54,1598.35 748.5,1600 748.54,1601.65 748.66,1603.31 748.9,1604.92 749.17,1606.54 749.57,1608.15 750.04,1609.72 750.59,1611.3 751.22,1612.8 751.93,1614.29 752.72,1615.75 753.58,1617.17 754.53,1618.5 755.51,1619.8 756.57,1621.06 757.72,1622.28 758.94,1623.43 760.2,1624.49 761.5,1625.47 762.83,1626.42 764.25,1627.28 765.71,1628.07 767.2,1628.78 768.7,1629.41 770.28,1629.96 771.85,1630.43 773.46,1630.83 775.08,1631.1 776.69,1631.34 778.35,1631.46 780,1631.5 874.49,1631.5
  Top Layer region: 874.49,1368.5 780,1368.5 778.35,1368.54 776.69,1368.66 775.08,1368.9 773.46,1369.17 771.85,1369.57 770.28,1370.04 768.7,1370.59 767.2,1371.22 765.71,1371.93 764.25,1372.72 762.83,1373.58 761.5,1374.53 760.2,1375.51 758.94,1376.57 757.72,1377.72 756.57,1378.94 755.51,1380.2 754.53,1381.5 753.58,1382.83 752.72,1384.25 751.93,1385.71 751.22,1387.2 750.59,1388.7 750.04,1390.28 749.57,1391.85 749.17,1393.46 748.9,1395.08 748.66,1396.69 748.54,1398.35 748.5,1400 748.54,1401.65 748.66,1403.31 748.9,1404.92 749.17,1406.54 749.57,1408.15 750.04,1409.72 750.59,1411.3 751.22,1412.8 751.93,1414.29 752.72,1415.75 753.58,1417.17 754.53,1418.5 755.51,1419.8 756.57,1421.06 757.72,1422.28 758.94,1423.43 760.2,1424.49 761.5,1425.47 762.83,1426.42 764.25,1427.28 765.71,1428.07 767.2,1428.78 768.7,1429.41 770.28,1429.96 771.85,1430.43 773.46,1430.83 775.08,1431.1 776.69,1431.34 778.35,1431.46 780,1431.5 874.49,1431.5
  Top Layer region: 874.49,1168.5 780,1168.5 778.35,1168.54 776.69,1168.66 775.08,1168.9 773.46,1169.17 771.85,1169.57 770.28,1170.04 768.7,1170.59 767.2,1171.22 765.71,1171.93 764.25,1172.72 762.83,1173.58 761.5,1174.53 760.2,1175.51 758.94,1176.57 757.72,1177.72 756.57,1178.94 755.51,1180.2 754.53,1181.5 753.58,1182.83 752.72,1184.25 751.93,1185.71 751.22,1187.2 750.59,1188.7 750.04,1190.28 749.57,1191.85 749.17,1193.46 748.9,1195.08 748.66,1196.69 748.54,1198.35 748.5,1200 748.54,1201.65 748.66,1203.31 748.9,1204.92 749.17,1206.54 749.57,1208.15 750.04,1209.72 750.59,1211.3 751.22,1212.8 751.93,1214.29 752.72,1215.75 753.58,1217.17 754.53,1218.5 755.51,1219.8 756.57,1221.06 757.72,1222.28 758.94,1223.43 760.2,1224.49 761.5,1225.47 762.83,1226.42 764.25,1227.28 765.71,1228.07 767.2,1228.78 768.7,1229.41 770.28,1229.96 771.85,1230.43 773.46,1230.83 775.08,1231.1 776.69,1231.34 778.35,1231.46 780,1231.5 874.49,1231.5
  Top Layer region: 874.49,1068.5 780,1068.5 778.35,1068.54 776.69,1068.66 775.08,1068.9 773.46,1069.17 771.85,1069.57 770.28,1070.04 768.7,1070.59 767.2,1071.22 765.71,1071.93 764.25,1072.72 762.83,1073.58 761.5,1074.53 760.2,1075.51 758.94,1076.57 757.72,1077.72 756.57,1078.94 755.51,1080.2 754.53,1081.5 753.58,1082.83 752.72,1084.25 751.93,1085.71 751.22,1087.2 750.59,1088.7 750.04,1090.28 749.57,1091.85 749.17,1093.46 748.9,1095.08 748.66,1096.69 748.54,1098.35 748.5,1100 748.54,1101.65 748.66,1103.31 748.9,1104.92 749.17,1106.54 749.57,1108.15 750.04,1109.72 750.59,1111.3 751.22,1112.8 751.93,1114.29 752.72,1115.75 753.58,1117.17 754.53,1118.5 755.51,1119.8 756.57,1121.06 757.72,1122.28 758.94,1123.43 760.2,1124.49 761.5,1125.47 762.83,1126.42 764.25,1127.28 765.71,1128.07 767.2,1128.78 768.7,1129.41 770.28,1129.96 771.85,1130.43 773.46,1130.83 775.08,1131.1 776.69,1131.34 778.35,1131.46 780,1131.5 874.49,1131.5
  Top Layer region: 874.49,668.5 780,668.5 778.35,668.54 776.69,668.66 775.08,668.9 773.46,669.17 771.85,669.57 770.28,670.04 768.7,670.59 767.2,671.22 765.71,671.93 764.25,672.72 762.83,673.58 761.5,674.53 760.2,675.51 758.94,676.57 757.72,677.72 756.57,678.94 755.51,680.2 754.53,681.5 753.58,682.83 752.72,684.25 751.93,685.71 751.22,687.2 750.59,688.7 750.04,690.28 749.57,691.85 749.17,693.46 748.9,695.08 748.66,696.69 748.54,698.35 748.5,700 748.54,701.65 748.66,703.31 748.9,704.92 749.17,706.54 749.57,708.15 750.04,709.72 750.59,711.3 751.22,712.8 751.93,714.29 752.72,715.75 753.58,717.17 754.53,718.5 755.51,719.8 756.57,721.06 757.72,722.28 758.94,723.43 760.2,724.49 761.5,725.47 762.83,726.42 764.25,727.28 765.71,728.07 767.2,728.78 768.7,729.41 770.28,729.96 771.85,730.43 773.46,730.83 775.08,731.1 776.69,731.34 778.35,731.46 780,731.5 874.49,731.5
  Top Layer region: 874.49,568.5 780,568.5 778.35,568.54 776.69,568.66 775.08,568.9 773.46,569.17 771.85,569.57 770.28,570.04 768.7,570.59 767.2,571.22 765.71,571.93 764.25,572.72 762.83,573.58 761.5,574.53 760.2,575.51 758.94,576.57 757.72,577.72 756.57,578.94 755.51,580.2 754.53,581.5 753.58,582.83 752.72,584.25 751.93,585.71 751.22,587.2 750.59,588.7 750.04,590.28 749.57,591.85 749.17,593.46 748.9,595.08 748.66,596.69 748.54,598.35 748.5,600 748.54,601.65 748.66,603.31 748.9,604.92 749.17,606.54 749.57,608.15 750.04,609.72 750.59,611.3 751.22,612.8 751.93,614.29 752.72,615.75 753.58,617.17 754.53,618.5 755.51,619.8 756.57,621.06 757.72,622.28 758.94,623.43 760.2,624.49 761.5,625.47 762.83,626.42 764.25,627.28 765.71,628.07 767.2,628.78 768.7,629.41 770.28,629.96 771.85,630.43 773.46,630.83 775.08,631.1 776.69,631.34 778.35,631.46 780,631.5 874.49,631.5
  Top Layer region: 874.49,468.5 780,468.5 778.35,468.54 776.69,468.66 775.08,468.9 773.46,469.17 771.85,469.57 770.28,470.04 768.7,470.59 767.2,471.22 765.71,471.93 764.25,472.72 762.83,473.58 761.5,474.53 760.2,475.51 758.94,476.57 757.72,477.72 756.57,478.94 755.51,480.2 754.53,481.5 753.58,482.83 752.72,484.25 751.93,485.71 751.22,487.2 750.59,488.7 750.04,490.28 749.57,491.85 749.17,493.46 748.9,495.08 748.66,496.69 748.54,498.35 748.5,500 748.54,501.65 748.66,503.31 748.9,504.92 749.17,506.54 749.57,508.15 750.04,509.72 750.59,511.3 751.22,512.8 751.93,514.29 752.72,515.75 753.58,517.17 754.53,518.5 755.51,519.8 756.57,521.06 757.72,522.28 758.94,523.43 760.2,524.49 761.5,525.47 762.83,526.42 764.25,527.28 765.71,528.07 767.2,528.78 768.7,529.41 770.28,529.96 771.85,530.43 773.46,530.83 775.08,531.1 776.69,531.34 778.35,531.46 780,531.5 874.49,531.5
  Top Layer region: 874.49,368.5 780,368.5 778.35,368.54 776.69,368.66 775.08,368.9 773.46,369.17 771.85,369.57 770.28,370.04 768.7,370.59 767.2,371.22 765.71,371.93 764.25,372.72 762.83,373.58 761.5,374.53 760.2,375.51 758.94,376.57 757.72,377.72 756.57,378.94 755.51,380.2 754.53,381.5 753.58,382.83 752.72,384.25 751.93,385.71 751.22,387.2 750.59,388.7 750.04,390.28 749.57,391.85 749.17,393.46 748.9,395.08 748.66,396.69 748.54,398.35 748.5,400 748.54,401.65 748.66,403.31 748.9,404.92 749.17,406.54 749.57,408.15 750.04,409.72 750.59,411.3 751.22,412.8 751.93,414.29 752.72,415.75 753.58,417.17 754.53,418.5 755.51,419.8 756.57,421.06 757.72,422.28 758.94,423.43 760.2,424.49 761.5,425.47 762.83,426.42 764.25,427.28 765.71,428.07 767.2,428.78 768.7,429.41 770.28,429.96 771.85,430.43 773.46,430.83 775.08,431.1 776.69,431.34 778.35,431.46 780,431.5 874.49,431.5
  Top Layer region: 874.49,168.5 780,168.5 778.35,168.54 776.69,168.66 775.08,168.9 773.46,169.17 771.85,169.57 770.28,170.04 768.7,170.59 767.2,171.22 765.71,171.93 764.25,172.72 762.83,173.58 761.5,174.53 760.2,175.51 758.94,176.57 757.72,177.72 756.57,178.94 755.51,180.2 754.53,181.5 753.58,182.83 752.72,184.25 751.93,185.71 751.22,187.2 750.59,188.7 750.04,190.28 749.57,191.85 749.17,193.46 748.9,195.08 748.66,196.69 748.54,198.35 748.5,200 748.54,201.65 748.66,203.31 748.9,204.92 749.17,206.54 749.57,208.15 750.04,209.72 750.59,211.3 751.22,212.8 751.93,214.29 752.72,215.75 753.58,217.17 754.53,218.5 755.51,219.8 756.57,221.06 757.72,222.28 758.94,223.43 760.2,224.49 761.5,225.47 762.83,226.42 764.25,227.28 765.71,228.07 767.2,228.78 768.7,229.41 770.28,229.96 771.85,230.43 773.46,230.83 775.08,231.1 776.69,231.34 778.35,231.46 780,231.5 874.49,231.5
  Top Layer region: 874.49,68.5 780,68.5 778.35,68.54 776.69,68.66 775.08,68.9 773.46,69.17 771.85,69.57 770.28,70.04 768.7,70.59 767.2,71.22 765.71,71.93 764.25,72.72 762.83,73.58 761.5,74.53 760.2,75.51 758.94,76.57 757.72,77.72 756.57,78.94 755.51,80.2 754.53,81.5 753.58,82.83 752.72,84.25 751.93,85.71 751.22,87.2 750.59,88.7 750.04,90.28 749.57,91.85 749.17,93.46 748.9,95.08 748.66,96.69 748.54,98.35 748.5,100 748.54,101.65 748.66,103.31 748.9,104.92 749.17,106.54 749.57,108.15 750.04,109.72 750.59,111.3 751.22,112.8 751.93,114.29 752.72,115.75 753.58,117.17 754.53,118.5 755.51,119.8 756.57,121.06 757.72,122.28 758.94,123.43 760.2,124.49 761.5,125.47 762.83,126.42 764.25,127.28 765.71,128.07 767.2,128.78 768.7,129.41 770.28,129.96 771.85,130.43 773.46,130.83 775.08,131.1 776.69,131.34 778.35,131.46 780,131.5 874.49,131.5
  Top Layer region: 874.49,1268.5 755.98,1268.5 755.55,1268.54 755.16,1268.58 754.72,1268.66 754.33,1268.78 753.94,1268.9 753.54,1269.02 753.19,1269.17 752.8,1269.37 752.44,1269.57 752.09,1269.76 751.73,1270 751.42,1270.28 751.1,1270.51 750.83,1270.83 750.51,1271.1 750.28,1271.42 750,1271.73 749.76,1272.09 749.57,1272.44 749.37,1272.8 749.17,1273.19 749.02,1273.54 748.9,1273.94 748.78,1274.33 748.66,1274.72 748.58,1275.16 748.54,1275.55 748.5,1275.98 748.5,1276.38 748.5,1323.62 748.5,1324.02 748.54,1324.45 748.58,1324.84 748.66,1325.28 748.78,1325.67 748.9,1326.06 749.02,1326.46 749.17,1326.81 749.37,1327.2 749.57,1327.56 749.76,1327.91 750,1328.27 750.28,1328.58 750.51,1328.9 750.83,1329.17 751.1,1329.49 751.42,1329.72 751.73,1330 752.09,1330.24 752.44,1330.43 752.8,1330.63 753.19,1330.83 753.54,1330.98 753.94,1331.1 754.33,1331.22 754.72,1331.34 755.16,1331.42 755.55,1331.46 755.98,1331.5 874.49,1331.5
  Top Layer region: 874.49,268.5 755.98,268.5 755.55,268.54 755.16,268.58 754.72,268.66 754.33,268.78 753.94,268.9 753.54,269.02 753.19,269.17 752.8,269.37 752.44,269.57 752.09,269.76 751.73,270 751.42,270.28 751.1,270.51 750.83,270.83 750.51,271.1 750.28,271.42 750,271.73 749.76,272.09 749.57,272.44 749.37,272.8 749.17,273.19 749.02,273.54 748.9,273.94 748.78,274.33 748.66,274.72 748.58,275.16 748.54,275.55 748.5,275.98 748.5,276.38 748.5,323.62 748.5,324.02 748.54,324.45 748.58,324.84 748.66,325.28 748.78,325.67 748.9,326.06 749.02,326.46 749.17,326.81 749.37,327.2 749.57,327.56 749.76,327.91 750,328.27 750.28,328.58 750.51,328.9 750.83,329.17 751.1,329.49 751.42,329.72 751.73,330 752.09,330.24 752.44,330.43 752.8,330.63 753.19,330.83 753.54,330.98 753.94,331.1 754.33,331.22 754.72,331.34 755.16,331.42 755.55,331.46 755.98,331.5 874.49,331.5
  Top Layer region: 331.65,140.51 333.31,140.39 334.92,140.16 336.54,139.88 338.15,139.49 339.72,139.02 341.3,138.46 342.8,137.83 344.29,137.13 345.75,136.34 347.17,135.47 348.5,134.53 349.8,133.54 351.06,132.48 352.28,131.34 353.43,130.12 354.49,128.86 355.47,127.56 356.42,126.22 357.28,124.8 358.07,123.35 358.78,121.85 359.41,120.35 359.96,118.78 360.43,117.2 360.83,115.59 361.1,113.98 361.34,112.36 361.46,110.71 361.5,109.06 361.5,14.57 298.5,14.57 298.5,109.06 298.54,110.71 298.66,112.36 298.9,113.98 299.17,115.59 299.57,117.2 300.04,118.78 300.59,120.35 301.22,121.85 301.93,123.35 302.72,124.8 303.58,126.22 304.53,127.56 305.51,128.86 306.57,130.12 307.72,131.34 308.94,132.48 310.2,133.54 311.5,134.53 312.83,135.47 314.25,136.34 315.71,137.13 317.2,137.83 318.7,138.46 320.28,139.02 321.85,139.49 323.46,139.88 325.08,140.16 326.69,140.39 328.35,140.51 330,140.55
  Top Layer region: 454.45,140.51 454.84,140.47 455.28,140.39 455.67,140.28 456.06,140.16 456.46,140.04 456.81,139.88 457.2,139.68 457.56,139.49 457.91,139.29 458.27,139.06 458.58,138.78 458.9,138.54 459.17,138.23 459.49,137.95 459.72,137.64 460,137.32 460.24,136.97 460.43,136.61 460.63,136.26 460.83,135.87 460.98,135.51 461.1,135.12 461.22,134.72 461.34,134.33 461.42,133.9 461.46,133.5 461.5,133.07 461.5,132.68 461.5,14.57 398.5,14.57 398.5,132.68 398.5,133.07 398.54,133.5 398.58,133.9 398.66,134.33 398.78,134.72 398.9,135.12 399.02,135.51 399.17,135.87 399.37,136.26 399.57,136.61 399.76,136.97 400,137.32 400.28,137.64 400.51,137.95 400.83,138.23 401.1,138.54 401.42,138.78 401.73,139.06 402.09,139.29 402.44,139.49 402.8,139.68 403.19,139.88 403.54,140.04 403.94,140.16 404.33,140.28 404.72,140.39 405.16,140.47 405.55,140.51 405.98,140.55 454.02,140.55
  Top Layer region: 531.65,140.51 533.31,140.39 534.92,140.16 536.54,139.88 538.15,139.49 539.72,139.02 541.3,138.46 542.8,137.83 544.29,137.13 545.75,136.34 547.17,135.47 548.5,134.53 549.8,133.54 551.06,132.48 552.28,131.34 553.43,130.12 554.49,128.86 555.47,127.56 556.42,126.22 557.28,124.8 558.07,123.35 558.78,121.85 559.41,120.35 559.96,118.78 560.43,117.2 560.83,115.59 561.1,113.98 561.34,112.36 561.46,110.71 561.5,109.06 561.5,14.57 498.5,14.57 498.5,109.06 498.54,110.71 498.66,112.36 498.9,113.98 499.17,115.59 499.57,117.2 500.04,118.78 500.59,120.35 501.22,121.85 501.93,123.35 502.72,124.8 503.58,126.22 504.53,127.56 505.51,128.86 506.57,130.12 507.72,131.34 508.94,132.48 510.2,133.54 511.5,134.53 512.83,135.47 514.25,136.34 515.71,137.13 517.2,137.83 518.7,138.46 520.28,139.02 521.85,139.49 523.46,139.88 525.08,140.16 526.69,140.39 528.35,140.51 530,140.55
  Top Layer region: 81.65,2031.46 83.31,2031.34 84.92,2031.1 86.54,2030.83 88.15,2030.43 89.72,2029.96 91.3,2029.41 92.8,2028.78 94.29,2028.07 95.75,2027.28 97.17,2026.42 98.5,2025.47 99.8,2024.49 101.06,2023.43 102.28,2022.28 103.43,2021.06 104.49,2019.8 105.47,2018.5 106.42,2017.17 107.28,2015.75 108.07,2014.29 108.78,2012.8 109.41,2011.3 109.96,2009.72 110.43,2008.15 110.83,2006.54 111.1,2004.92 111.34,2003.31 111.46,2001.65 111.5,2000 111.46,1998.35 111.34,1996.69 111.1,1995.08 110.83,1993.46 110.43,1991.85 109.96,1990.28 109.41,1988.7 108.78,1987.2 108.07,1985.71 107.28,1984.25 106.42,1982.83 105.47,1981.5 104.49,1980.2 103.43,1978.94 102.28,1977.72 101.06,1976.57 99.8,1975.51 98.5,1974.53 97.17,1973.58 95.75,1972.72 94.29,1971.93 92.8,1971.22 91.3,1970.59 89.72,1970.04 88.15,1969.57 86.54,1969.17 84.92,1968.9 83.31,1968.66 81.65,1968.54 80,1968.5 -14.49,1968.5 -14.49,2031.5 80,2031.5
  silkscreen extent -54,46 843,2105, body extent 17,46 843,2105, height 147
resistor [mil]
  rrect50% 60x70 hole 35: 1(15,70) 2(515,70)
  body extent 0,-4 530,144, height 369

## Nets (pads, with @x,y where several pads share a name; then routed paths per layer and width w, separated by ;. In a path a pad name is that pad's centre, name@x,y a point inside that pad or via, vN(x,y) a via of type N, cw(c..) or ccw(c..) an arc to the next point about the centre after c; other vN are vias at no path point)
GND: *.2@8927.48,3115 *.C M1.3 M1.8 M1.13 M1.18 M1.23 M1.28 M1.33 M1.38 M1.D2
Net*_1: *.1@8770,3115 *.2@8610,3165
Net*_2: *.2@8415,3165 *.A
NetM1_37: M1.37
pads on no net: *.1@7147.24,2954.88 *.1@8415,2665 *.1@8610,2665 *.1@9115,2420 *.2@7446.46,2954.88 *.2@9115,2520 *.3 *.4 *.5 *.6 *.7 *.8 M1.1 M1.2 M1.4 M1.5 M1.6 M1.7 M1.9 M1.10 M1.11 M1.12 M1.14 M1.15 M1.16 M1.17 M1.19 M1.20 M1.21 M1.22 M1.24 M1.25 M1.26 M1.27 M1.29 M1.30 M1.31 M1.32 M1.34 M1.35 M1.36 M1.39 M1.40 M1.A M1.B M1.C M1.D M1.D1 M1.D3 M1.TP1 M1.TP2 M1.TP3 M1.TP4 M1.TP5 M1.TP6 P1.1 P1.2